# Altium PCB PCB1.PcbDoc
Units mm, origin at the board's own origin, x right, y up, seen from the top; angles counter-clockwise.
Board outline 55.37 x 53.34 mm, 2 copper layers (Top Layer, Bottom Layer); 15 components, 13 nets, 65 pads, 0 vias.
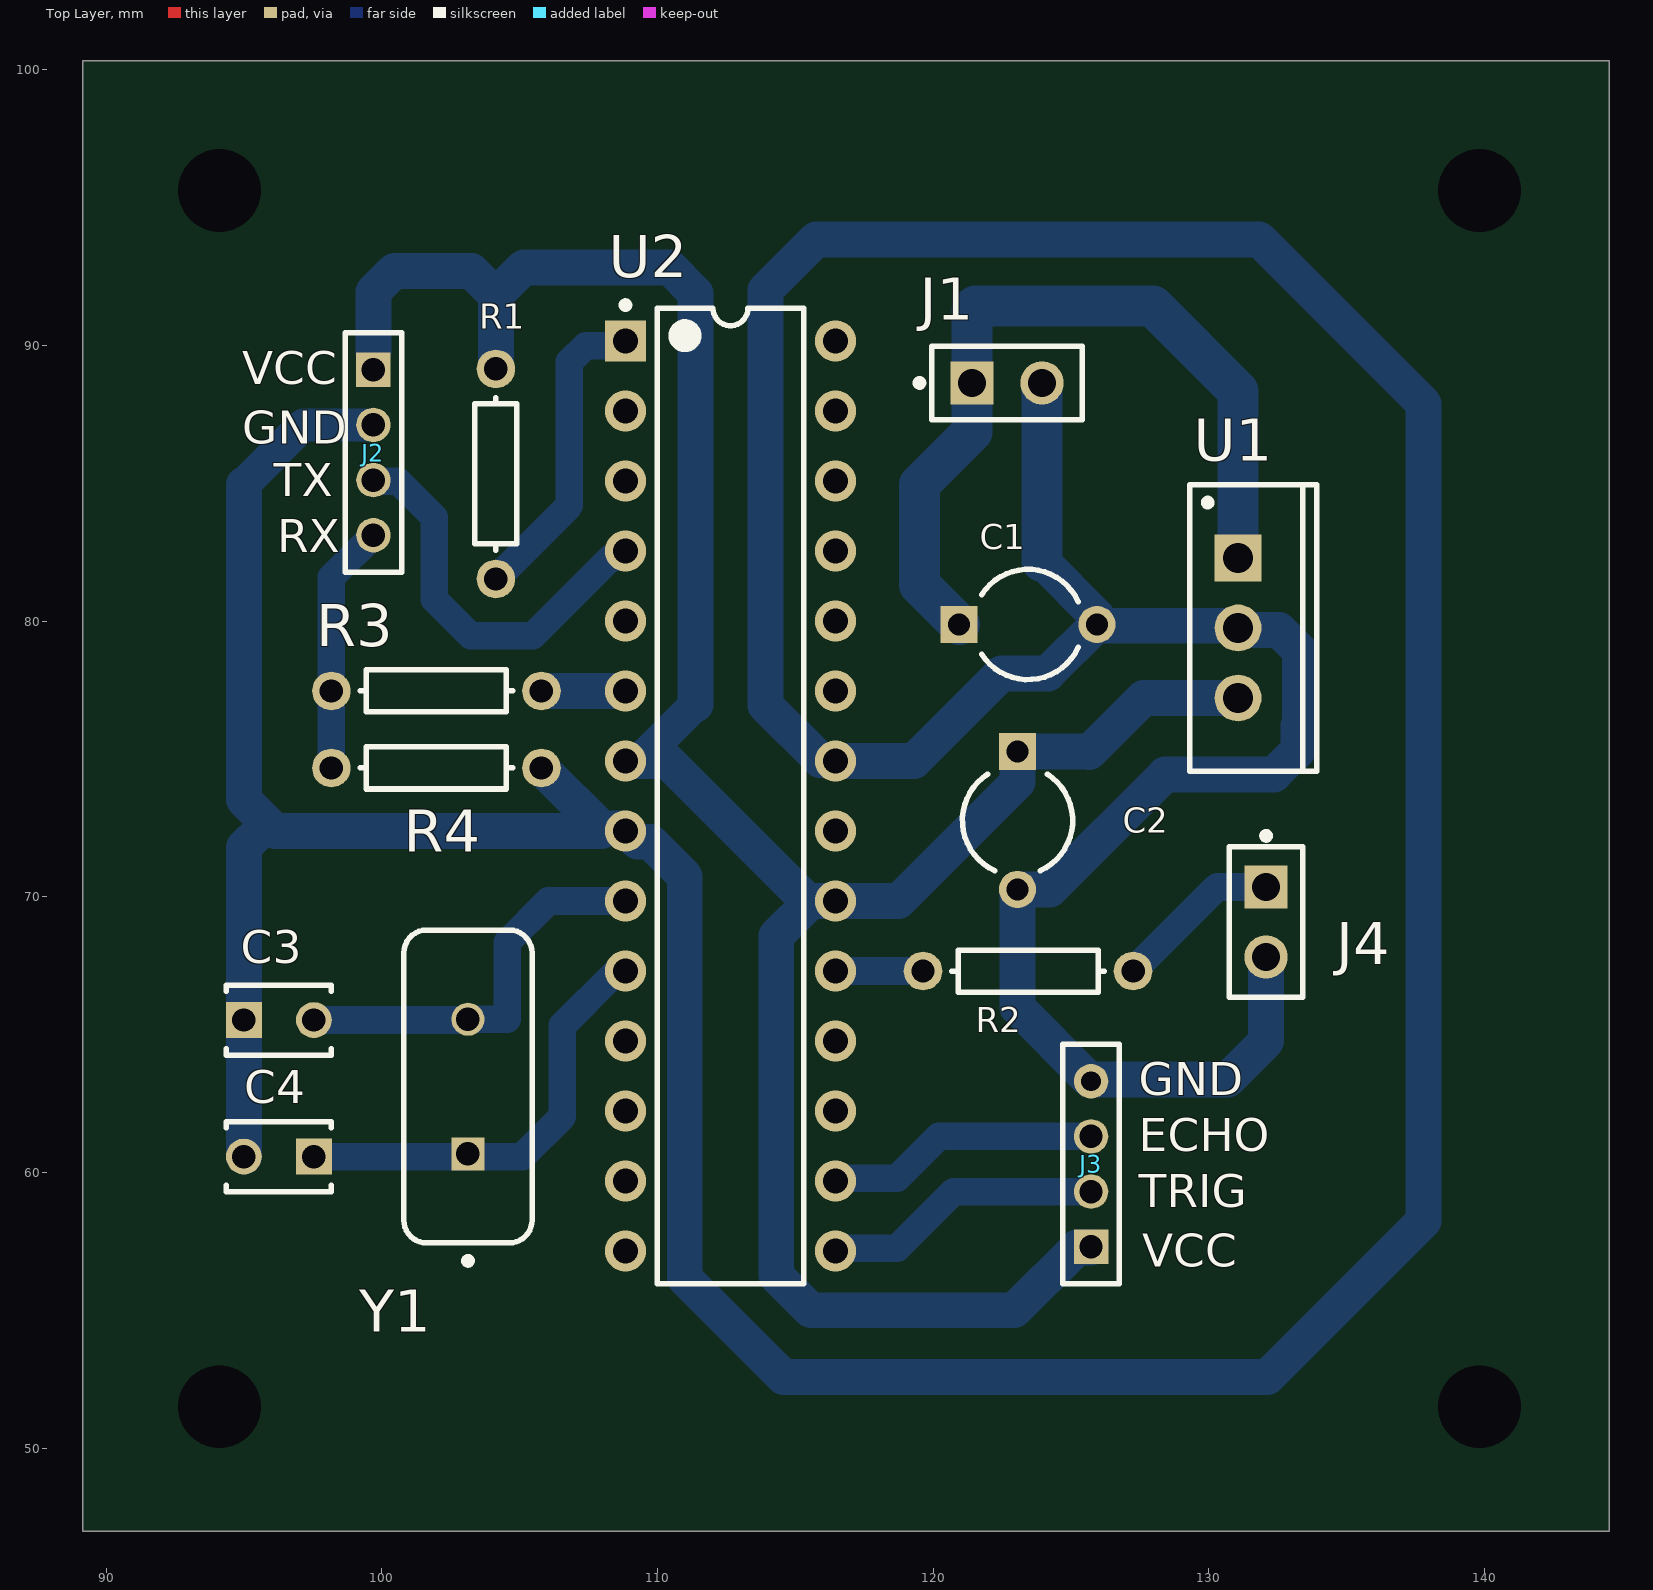
[diagram p0: Top Layer view]
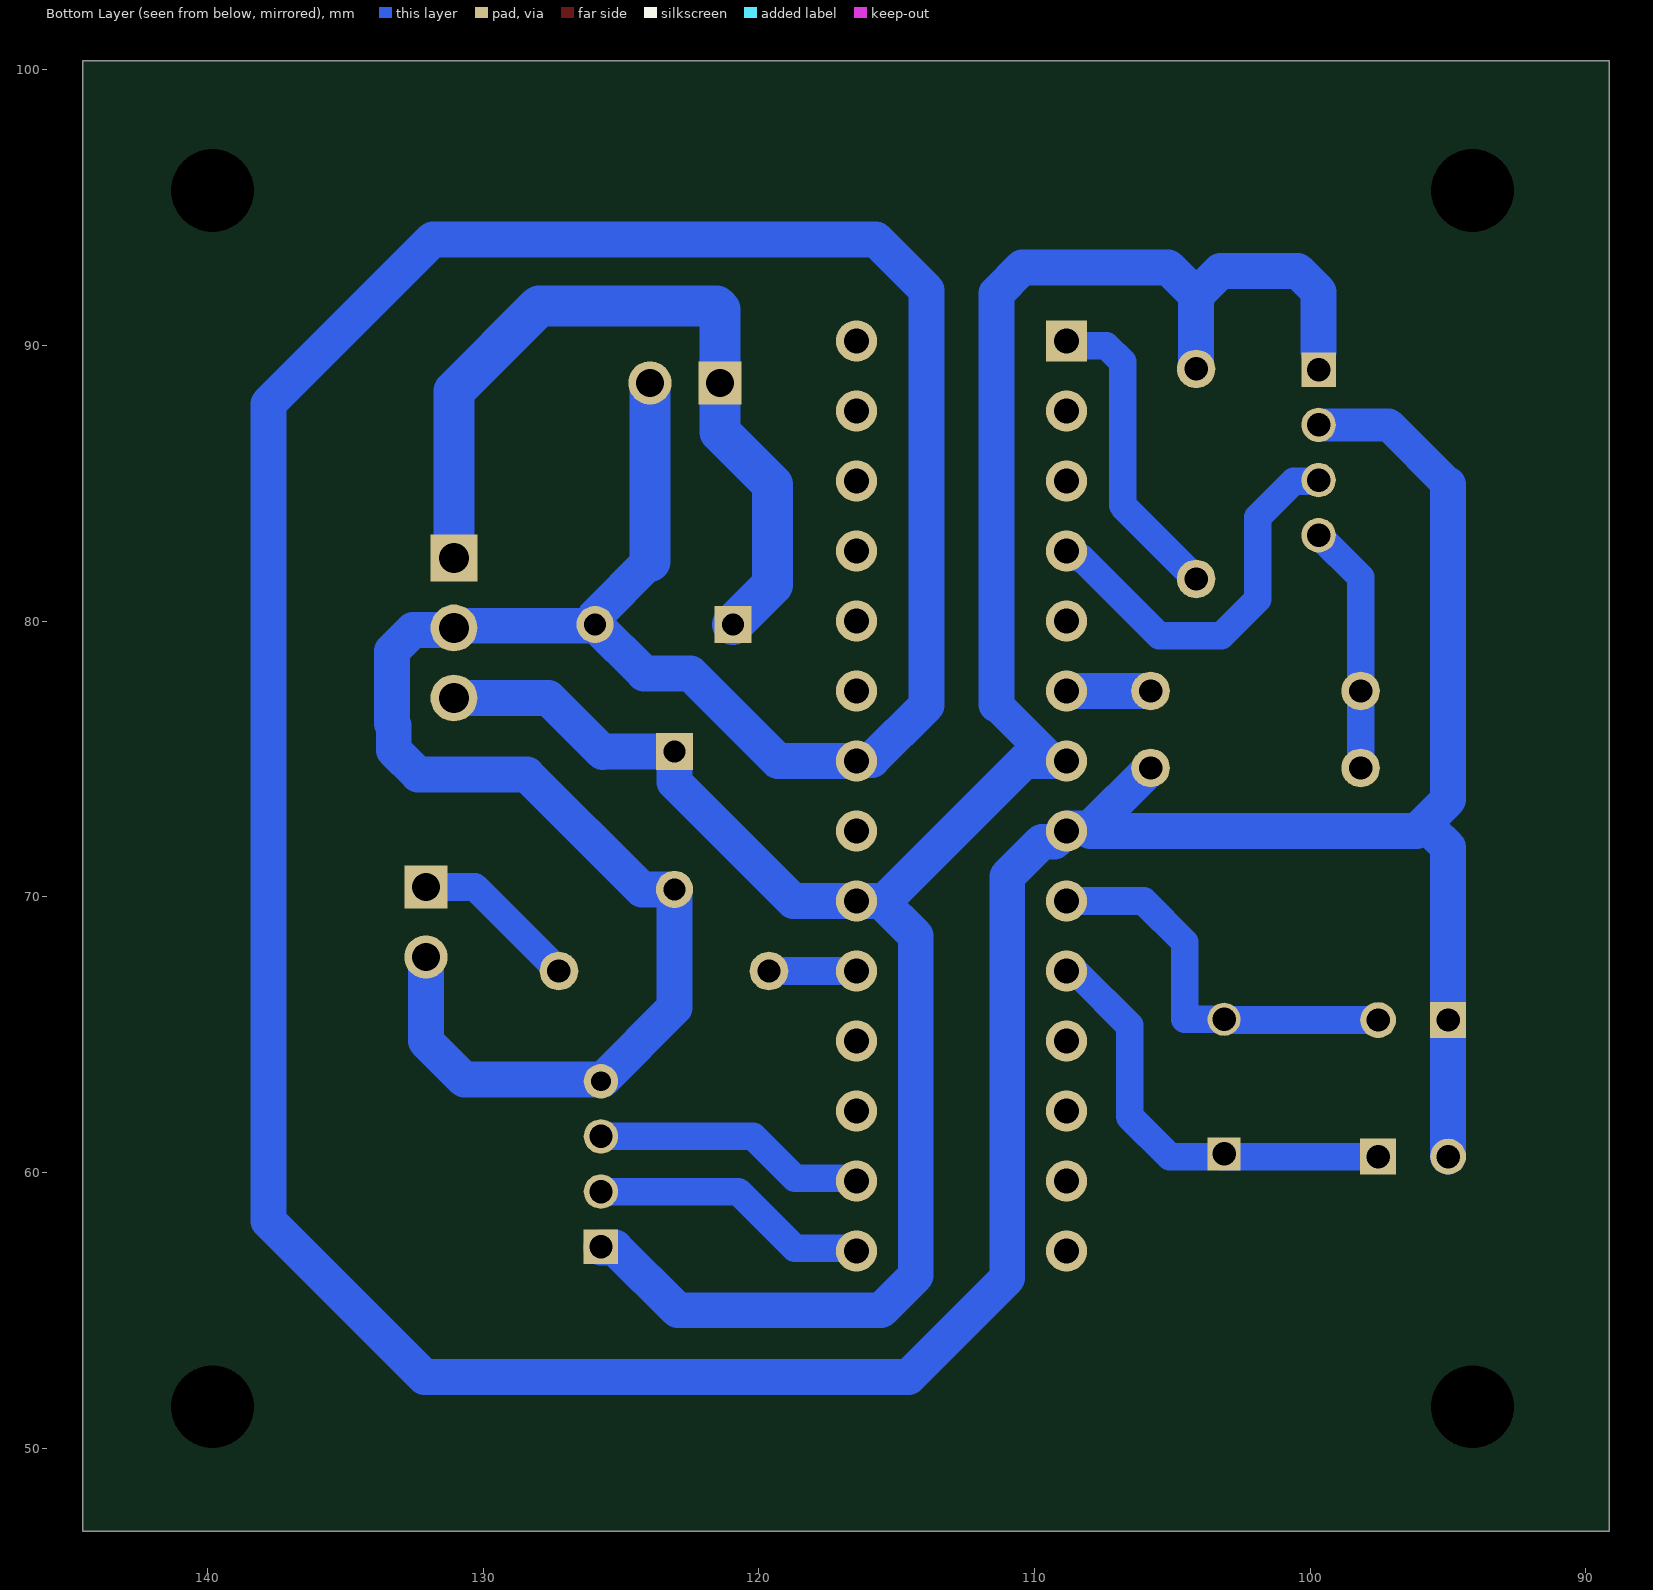
[diagram p1: Bottom Layer view, seen from below]

## Layer stack, top to bottom
Top Solder: solder mask 0.0102, Solder Resist, Dk 3.5
Top Layer: signal copper 0.0356
Dielectric 1: dielectric 0.32, FR-4, Dk 4.8
Bottom Layer: signal copper 0.0356
Bottom Solder: solder mask 0.0102, Solder Resist, Dk 3.5

## Board outline
89.154,46.99 144.526,46.99 144.526,100.33 89.154,100.33

## Design rules (kind name [scope] priority, off if disabled: settings)
AssemblyTestPointUsage [All] p1 off:
AssemblyTestpoint [All] p1 off: testpointundercomponent=TRUE minsize=1.016 maxsize=2.54 preferedsize=1.524 minholesize=0 maxholesize=1.016 preferedholesize=0.813 testpointgrid=0.025 usegrid=TRUE gridtolerance=0 allowsidetop=TRUE allowsidebottom=TRUE
Clearance [All] p1: gap=0.75 ignorepadtopadclearanceinfootprint=FALSE
FabricationTestPointUsage [All] p1 off: valid=0 allowmultiple=FALSE
FabricationTestpoint [All] p1 off: side=3 testpointundercomponent=TRUE minsize=1.016 maxsize=2.54 preferedsize=1.524 minholesize=0 maxholesize=1.016 preferedholesize=0.813 testpointgrid=0.025 allowsidetop=TRUE allowsidebottom=TRUE usegrid=TRUE gridtolerance=0
HoleSize [All] p1 off: absolutevalues=TRUE maxlimit=3 minlimit=0 maxpercent=80.000 minpercent=20.000
PolygonConnect [All] p1: connectstyle=Relief reliefconductorwidth=0.254 reliefentries=4 polygonreliefangle="90 Angle" airgapwidth=0.254
RoutingVias [All] p1: holewidth=0.711 width=1.27 viastyle="Through Hole" minholewidth=0.711 minwidth=1.27 maxholewidth=0.711 maxwidth=1.27
SilkToSolderMaskClearance [IsPad] p1: minsilkscreentomaskgap=0.2 clearancetoexposedcopper=TRUE
SolderMaskExpansion [All] p1: expansion=0.102 istentingtop=FALSE
Width [All] p1: maxlimit=2 minlimit=0.254 preferedwidth=1 minimp=50.000000 maximp=50.000000 favimp=50.000000
24 further rules are at their usual default settings.

## Components (designator, comment, footprint, x,y, rotation, side; value= is the part's Value field where it differs from the comment)
C1 "Cap2" CAPR5-4X5 123.444,79.883 r0 top value=10uF
C2 "Cap2" CAPR5-4X5 123.063,72.771 r270 top value=470uF
C3 "C315C220K1G5TA" KEMT-C315-THT-2 96.266,65.532 r0 top
C4 "C315C220K1G5TA" KEMT-C315-THT-2 96.266,60.579 r180 top
J1 "TSW-102-07-F-S" FP-TSW-102-07-F-S-MFG 122.682,88.646 r0 top
J2 "MMS-104-01-T-SV" SMTC-MMS-104-01-X-SV#1 99.695,89.122 r270 top
J3 "MMS-104-01-T-SV" SMTC-MMS-104-01-X-SV#2 125.73,57.309 r90 top
J4 "TSW-102-07-L-S" FP-TSW-102-07-L-S-MFG 132.08,69.088 r270 top
R1 "Res1" AXIAL-0.3 104.14,85.344 r90 top value=10K
R2 "Res1" AXIAL-0.3 123.444,67.31 r0 top value=0.22K
R3 "Res1" AXIAL-0.3 101.981,77.47 r180 top value=330Ω
R4 "Res1" AXIAL-0.3 101.981,74.676 r180 top value=470Ω
U1 "L7805CV" TO220 131.064,79.756 r270 top
U2 "ATmega328-PU" 28P3 112.649,73.66 r0 top
Y1 "FOXSLF/160-20" FOX-FOXSLF160-20 103.124,63.119 r90 top

## Footprints (in the part's own frame and the unit in brackets; to place one, negate y for a bottom-side part, rotate by r counter-clockwise, add the part's x,y. Pads: shape width x height; smd on the part's side, far side on the other; paste and mask are expansions set on the pad)
28P3 [mm] "28-Pin Plastic Dual In-Line Package (PDIP)"
  rect 1.5x1.5 hole 0.9: 1(-3.81,16.51)
  round 1.5 hole 0.9: 2(-3.81,13.97) 3(-3.81,11.43) 4(-3.81,8.89) 5(-3.81,6.35) 6(-3.81,3.81) 7(-3.81,1.27) 8(-3.81,-1.27) 9(-3.81,-3.81) 10(-3.81,-6.35) 11(-3.81,-8.89) 12(-3.81,-11.43) 13(-3.81,-13.97) 14(-3.81,-16.51) 15(3.81,-16.51) 16(3.81,-13.97) 17(3.81,-11.43) 18(3.81,-8.89) 19(3.81,-6.35) 20(3.81,-3.81) 21(3.81,-1.27) 22(3.81,1.27) 23(3.81,3.81) 24(3.81,6.35) 25(3.81,8.89) 26(3.81,11.43) 27(3.81,13.97) 28(3.81,16.51)
  silkscreen extent -3.93,-17.7 2.65,17.93, body extent -3.6,-17.65 3.6,17.65, height 4.58
AXIAL-0.3 [mm] "Axial Device, Thru-Hole; 2 Leads; 0.3 in Pin Spacing"
  round 1.4 hole 0.85: 1(-3.81,0) 2(3.81,0)
  silkscreen extent -2.77,-0.76 2.77,0.76
CAPR5-4X5 [mm] "Capacitor; 2 Leads"
  rect 1.35x1.35 hole 0.8: 1(-2.5,0)
  round 1.35 hole 0.8: 2(2.5,0)
  silkscreen extent -1.69,-2 1.82,2
FOX-FOXSLF160-20 [mm] "THD, 2-Leads, Body 11.35x4.65mm"
  rect 1.2x1.2 hole 0.85: 1(-2.44,0)
  round 1.2 hole 0.85: 2(2.44,0)
  silkscreen extent -6.45,-2.32 5.68,2.32, body extent -5.67,-2.32 5.68,2.33, height 3.6
FP-TSW-102-07-F-S-MFG [mm]
  rect 1.57x1.57 hole 1.02 paste-1000 mask+0: 1(-1.27,0)
  round 1.57 hole 1.02 paste-1000 mask+0: 2(1.27,0)
  silkscreen extent -3.3,-1.34 2.73,1.34, body extent -2.83,-1.44 2.83,1.44, height 0.25
FP-TSW-102-07-L-S-MFG [mm]
  rect 1.57x1.57 hole 1.02 paste-1000 mask+0: 1(-1.27,0)
  round 1.57 hole 1.02 paste-1000 mask+0: 2(1.27,0)
  silkscreen extent -3.25,-1.34 2.73,1.34, body extent -2.83,-1.44 2.83,1.44, height 0.25
KEMT-C315-THT-2 [mm] "THD, 2-Leads, Body 3.81x2.54mm"
  rect 1.3x1.3 hole 0.85: 1(-1.27,0)
  round 1.3 hole 0.85: 2(1.27,0)
  silkscreen extent -1.91,-1.27 1.91,1.27, body extent -1.91,-1.27 1.91,1.27, height 4.66
SMTC-MMS-104-01-X-SV#1 [mm] "Through Hole Box Connector Strip Assembly, 1x4 Pins, Vertical, 2mm Pitch, Female"
  rect 1.25x1.25 hole 0.85: 1(0,0)
  round 1.25 hole 0.85: 2(2,0) 3(4,0) 4(6,0)
  silkscreen extent -1.35,-1.03 7.34,1.03, body extent -1.28,-1 7.28,1, height 4.44
SMTC-MMS-104-01-X-SV#2 [mm] "Through Hole Box Connector Strip Assembly, 1x4 Pins, Vertical, 2mm Pitch, Female"
  rect 1.25x1.25 hole 0.85: 1(0,0)
  round 1.25 hole 0.85: 2(2,0) 3(4,0)
  round 1.25 hole 0.711: 4(6,0)
  silkscreen extent -1.35,-1.03 7.34,1.03, body extent -1.28,-1 7.28,1, height 4.44
TO220 [mm] "TO, Thru-Hole, Vertical, Heatsink Mounted; 3 In-Line Leads; Pitch 2.54 mm"
  rect 1.7x1.7 hole 1.1: 1(-2.54,0)
  round 1.7 hole 1.1: 2(0,0) 3(2.54,0)
  silkscreen extent -5.2,-1.75 5.2,2.85, body extent -5.25,-1.8 5.25,2.9, height 19.7

## Part data
C1 C2: "Capacitor", PackageDescription="Capacitor; 2 Leads", PackageReference=CAPR5-4X5, Published=23-Sep-2002, Publisher="Altium Limited"
C3 C4: library part CMP-1664-00008-1, "Capacitor, Ceramic, 22 pF, +/-10 %, 100 V, -55 to 125 degC, 2-Pin THD, RoHS, Bulk", Case\Package=TO-220, Max Input Voltage="40 V", Max Operating Temperature="125 degC", Max Ouput Current="1.5 A", Min Input Voltage="4.2 V", Min Operating Temperature="0 degC", Output Voltage="1.2 V", Package Quantity=50, ComponentLink1Description="Manufacturer URL", ComponentLink1URL=http://www.kemet.com/, ComponentLink2Description=Datasheet, ComponentLink2URL=http://capacitoredge.kemet.com/capedge2/DataSheet/Datasheet-C315C220K1G5TA.pdf?pn=C315C220K1G5TA{BULK}, DatasheetVersion=Aug-16, Height="9.28 mm", Length="10.28 mm", Mount="Through Hole", Output Current="1.5 A", Outputs=1, PackageDescription="2-Pin Through Hole Device, Body 3.81 x 2.54 mm", PackageReference=C315-THT-2, Packaging=Rail/Tube, Pins=3, Radiation Hardening=No, REACH SVHC="No SVHC", RoHSCompliant=true, Weight="0.08113 oz", Width="4.82 mm"
J1: library part CMP-02766-001458-1, "CONN HEADER VERT 2POS 2.54MM", Color=Black, Flammability Rating="UL94 V-0", Max Current Rating=7.6A, Max Operating Temperature=125°C, Max Voltage Rating (AC)=550V, Min Operating Temperature=-55°C, Package Quantity=1, Connector Type=Header, Contact Finish - Mating=GOLD, Contact Material=Bronze, Contact Mating Length=0.23inch, Contact Plating=Gold, Contact Shape=Square, Contact Type="Male Pin", Depth=2.54mm, Fastening Type=Pull, Gender=Male, Housing Color=Black, Housing Material=Polyester, Insulation Color=Black, Insulation Material=PBT, Length=5.08mm, Mount="Through Hole", Number of Contacts=2, Number of Positions=2, Number of Rows=1, Orientation=Straight, Packaging=Bulk, Pitch=2.54mm, Radiation Hardening=No, REACH SVHC="No SVHC", RoHS Compliant=Yes, Series=TSW, Termination=Solder
J2 J3: library part CMP-1022-00068-1, "Tiger Claw(TM) Socket Strip, Through-hole, Vertical, -55 to 105 degC, 2 mm Pitch, 4-Pin, Female, RoHS", Manufacturer=Samtec, Temperature Range="-55 to 105 degC", ComponentLink1Description="Manufacturer URL", ComponentLink1URL=http://www.samtec.com, ComponentLink2Description=Datasheet, ComponentLink2URL=http://www.samtec.com/documents/webfiles/pdf/MMS.PDF, ComponentLink3Description="Package Specification", ComponentLink3URL=http://www.samtec.com/documents/webfiles/cpdf/MMS-1XX-01-XXX-XX-XXX-MKT1.pdf, DatasheetVersion=F-214, Mounting Technology=Through-hole, Orientation=Vertical, PackageDescription="2mm Through Hole Box Connector Strip Assembly", PackageReference=MMS-104-01-X-SV, PackageVersion="AO, 2/1993", PartNumber=MMS-104-01-T-SV, Pitch="2 mm", RoHS=True
J4: library part CMP-02766-001428-1, "CONN HEADER VERT 2POS 2.54MM", Color=Black, Current Rating=7.6A, Max Operating Temperature=125°C, Max Voltage Rating (AC)=550V, Min Operating Temperature=-55°C, Package Quantity=1, Connector Type="Male Pin", Contact Material=Bronze, Contact Mating Length=0.23inch, Contact Plating=Gold, Contact Type="Male Pin", Depth=2.54mm, Gender=Male, Housing Color=Black, Housing Material=Polyester, Lead Free="Lead Free", Length=5.08mm, Max Current Rating=7.6A, Mount="Through Hole", Number of Contacts=2, Number of Positions=2, Number of Rows=1, Orientation=Straight, Packaging=Bulk, Pitch=2.54mm, Radiation Hardening=No, REACH SVHC="No SVHC", RoHS Compliant=Yes, Series=TSW, Termination=Solder, Voltage Rating=550V, Width=2.54mm
R1 R2 R3 R4: "Resistor", LatestRevisionDate=17-Jul-2002, LatestRevisionNote="Re-released for DXP Platform.", PackageDescription="Axial Device, Thru-Hole; 2 Leads; 0.3 in Pin Spacing", PackageReference=AXIAL-0.3, Published=8-Jun-2000, Publisher="Altium Limited"
U1: library part CMP-0244-00483-1, "Positive Voltage Regulator, 5V, 3-Pin TO-220", ComponentLink1Description="Manufacturer URL", ComponentLink1URL=http://www.st.com, ComponentLink2Description=Datasheet, ComponentLink2URL=http://www.st.com/internet/com/TECHNICAL_RESOURCES/TECHNICAL_LITERATURE/DATASHEET/CD00000444.pdf, ComponentLink3Description="Package Specification", ComponentLink3URL=http://www.st.com/internet/com/TECHNICAL_RESOURCES/TECHNICAL_LITERATURE/PACKAGE_INFORMATION/CD00004649.pdf, DatasheetVersion=16/11/2011, PackageDescription="TO, Thru-Hole, Vertical, Heatsink Mounted; 3 In-Line Leads; Pitch 2.54 mm", PackageReference=TO220, PackageVersion=ver3.0
U2: library part CMP-0095-00015-2, "8-bit AVR Microcontroller, 32KB Flash, 1KB EEPROM, 2KB SRAM, 28-pin PDIP, Industrial Grade (-40°C to 85°C)", ComponentLink1Description="Manufacturer URL", ComponentLink1URL=http://www.atmel.com/, ComponentLink2Description="ATmega48A/48PA/88A/88PA/168A/168PA/328/328P Datasheet", ComponentLink2URL=http://www.atmel.com/dyn/resources/prod_documents/8271.pdf, ComponentLink3Description="ATmega48A/48PA/88A/88PA/168A/168PA/328/328P Summary", ComponentLink3URL=http://www.atmel.com/dyn/resources/prod_documents/8271S.pdf, DatasheetVersion="revD, May-2011", PackageDescription="28-lead (0.300\"/7.62mm Wide) Plastic Dual Inline Package (PDIP)", PackageReference=28P3, PackageVersion="revB, Sep-2001", RevisionNote="DatasheetVersion updated. URLs added."
Y1: library part CMP-1749-00003-1, "Resistance Weld Thru-Hole Crystal, 16 MHz, -20 to 70 degC, 2-Pin THD, RoHS, Bulk", Case\Package=Axial, Max Operating Temperature="155 degC", Min Operating Temperature="-55 degC", Package Quantity=200, Power Rating="250 mW", Resistance="221 kohm", Tolerance=1%, Voltage Rating="250 V", ComponentLink1Description="Manufacturer URL", ComponentLink1URL=http://www.foxonline.com/, ComponentLink2Description=Datasheet, ComponentLink2URL=http://www.foxonline.com/pdfs/hc49slf.pdf, DatasheetVersion=Mar-15, Length="0.248 inch", Mount="Through Hole", PackageDescription="2-Pin Through Hole Device, Body 11.35 x 4.65 mm", PackageReference=FOXSLF160-20, Packaging=Bulk, RoHSCompliant=true

## Free pads (board coordinates)
  round 0 hole 3 unplated: 2(94.107,95.631) 3(94.107,51.5) 4(139.827,51.5) 5(139.827,95.631)

## Nets (pads, with @x,y where several pads share a name; then routed paths per layer and width w, separated by ;. In a path a pad name is that pad's centre, name@x,y a point inside that pad or via, vN(x,y) a via of type N, cw(c..) or ccw(c..) an arc to the next point about the centre after c; other vN are vias at no path point)
+5V: C2.1 J2.1 J3.1 R1.2 U1.3 U2.7 U2.20 | length 91.2
  Bottom Layer w1.2: U2.7 108.896,74.987 109.391,74.987 111.379,76.975
  Bottom Layer w1.3: 99.695,89.789 99.695,91.948 100.457,92.71 103.251,92.71 104.14,91.821 ; R1.2 104.14,91.821 ; U2.7 110.363,74.93 115.405,69.888 ; 111.379,76.975 111.379,91.903 110.445,92.837 105.156,92.837 104.14,91.821 ; J3.1@125.73,57.277 125.222,57.277 122.945,55 115.568,55 114.309,56.259 114.309,68.589 115.57,69.85 U2.20 118.745,69.85 123.063,74.168 C2.1 125.643,75.271 125.666,75.248 127.635,77.216 U1.3
GND: C1.2 C2.2 C3.1 C4.2 J1.2 J2.2 J3.4 J4.2 R4.1 U1.2 U2.8 U2.22 | length 232.4
  Bottom Layer w1.2: 94.996,84.962 97.156,87.122 J2.2
  Bottom Layer w1.3: C4.2 C3.1 94.996,71.803 95.583,72.39 ; 94.996,84.962 94.996,73.532 96.138,72.39 107.981,72.39 ; R4.1 107.981,72.486 108.743,72.486 U2.8 108.893,72.39 109.283,72 109.73,72 110.989,70.741 110.989,56.167 114.578,52.578 132.128,52.578 137.795,58.245 137.795,87.884 131.826,93.853 115.762,93.853 113.919,92.01 113.919,76.95 115.901,74.968 116.421,74.968 U2.22 119.293,74.93 ; 119.302,74.921 122.486,78.105 124.166,78.105 C1.2@125.934,79.873 ; 123.952,82.169 125.934,80.187 125.934,79.893 C1.2 ; C1.2@125.991,79.836 130.843,79.836 130.884,79.794 131.026,79.794 131.141,79.679 132.552,79.679 133.314,78.918 133.314,76.284 133.246,76.216 133.246,75.319 132.367,74.44 128.415,74.44 124.246,70.271 C2.2 123.063,65.976 125.666,63.373 130.683,63.373 132.08,64.77 J4.2
  Bottom Layer w1.5: 123.952,82.169 J1.2@123.952,88.565
NetC1_1: C1.1 J1.1 U1.1 | length 29.8
  Bottom Layer w1.5: C1.1 119.507,81.32 119.507,84.963 121.412,86.868 121.412,88.565 121.412,91.313 121.539,91.44 127.967,91.44 131.064,88.343 U1.1
NetC3_2: C3.2 U2.9 Y1.2 | length 14.7
  Bottom Layer w1: C3.2 Y1.2@103.124,65.532 ; Y1.2 104.548,65.559 104.548,68.353 106.045,69.85 U2.9
NetC4_1: C4.1 U2.10 Y1.1 | length 15.5
  Bottom Layer w1: C4.1 103.024,60.579 Y1.1 Y1.1@103.224,60.579 ; 103.786,60.579 105.099,60.579 106.553,62.033 106.553,65.335 108.433,67.214 108.743,67.214 U2.10
NetJ2_3: J2.3 U2.4 | length 14.6
  Bottom Layer w1: J2.3@99.763,85.122 J2.3 99.743,85.074 100.6,85.074 101.902,83.772 101.902,80.798 103.23,79.47 105.471,79.47 108.301,82.3 108.454,82.3 108.704,82.55 U2.4
NetJ2_4: J2.4 R3.2 R4.2 | length 9.1
  Bottom Layer w1: R4.2 R3.2 98.171,81.598 J2.4
NetJ3_2: J3.2 U2.15 | length 10.2
  Bottom Layer w1: U2.15 116.555,57.246 118.69,57.246 120.753,59.309 J3.2
NetJ3_3: J3.3 U2.16 | length 9.9
  Bottom Layer w1: U2.16 116.555,59.786 118.69,59.786 120.213,61.309 J3.3
NetJ4_1: J4.1 R2.2 | length 6.2
  Bottom Layer w1: R2.2@127.254,67.418 R2.2 130.302,70.358 J4.1
NetR1_1: R1.1 U2.1 | length 11.4
  Bottom Layer w1: R1.1@104.248,81.534 R1.1 106.807,84.201 106.807,89.409 107.393,89.995 108.664,89.995 U2.1
NetR2_1: R2.1 U2.19 | length 3.2
  Bottom Layer w1: U2.19 R2.1
NetR3_1: R3.1 U2.6 | length 3
  Bottom Layer w1.3: R3.1 U2.6
pads on no net: U2.2 U2.3 U2.5 U2.11 U2.12 U2.13 U2.14 U2.17 U2.18 U2.21 U2.23 U2.24 U2.25 U2.26 U2.27 U2.28

## Silkscreen, mask and mechanical layers (free items; w line width, h text height)
Top Overlay:
  text "VCC" at 94.942,88.592 h1.2
  text "GND" at 94.942,86.433 h1.2
  text "TX" at 96.085,84.528 h1.2
  text "RX" at 96.212,82.496 h1.2
  text "GND" at 127.454,62.811 h1.2
  text "ECHO" at 127.454,60.779 h1.2
  text "TRIG" at 127.454,58.747 h1.2
  text "VCC" at 127.581,56.588 h1.2
Outline:
  lines w0.8: 90.932,48.514 90.932,98.552 93.98,98.552 143.002,98.552 143.002,48.514 90.932,48.514